# EAGLE board datalogger v1 (EAGLE 9.6.2)
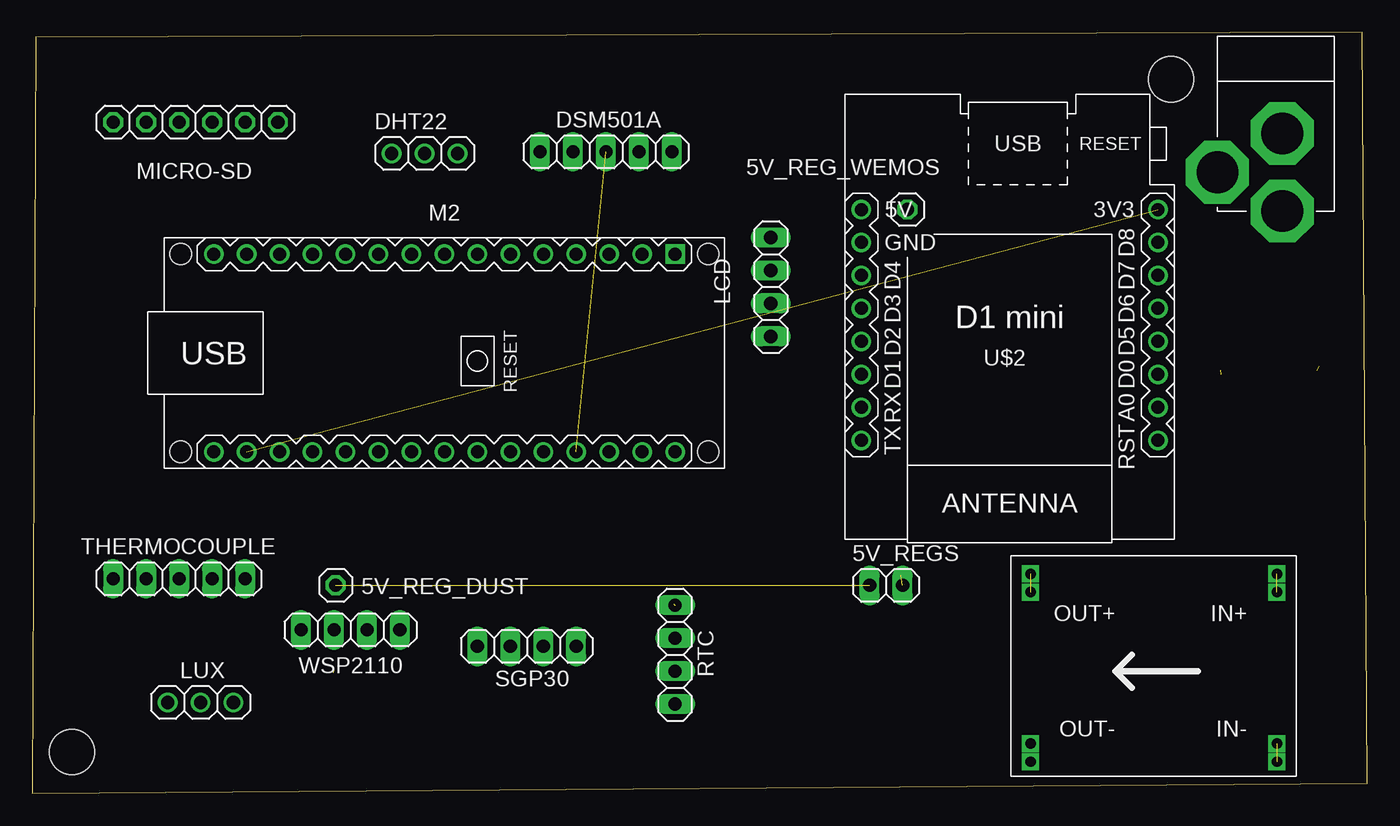
[diagram p0: board, top side]
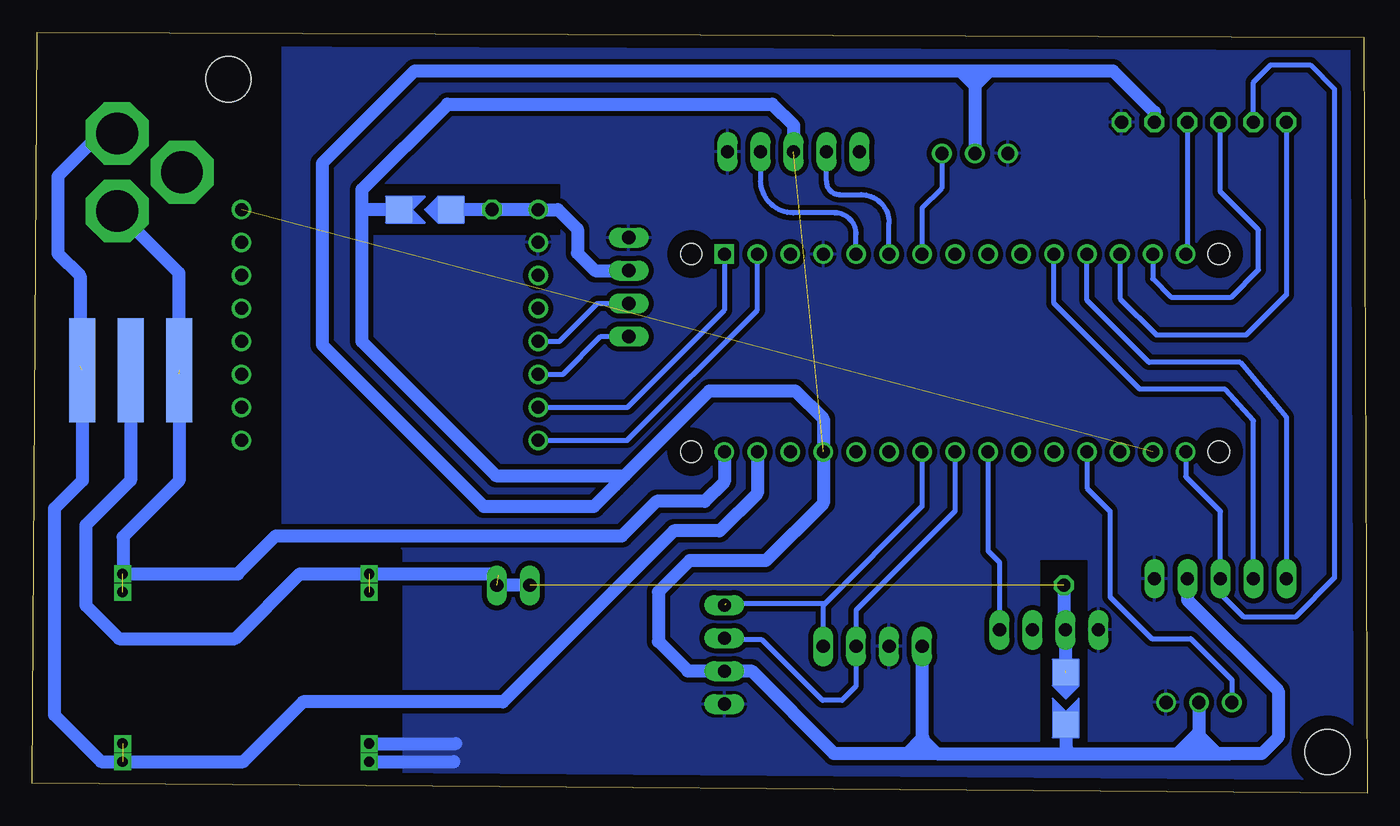
[diagram p1: board, bottom side, seen from below]

Size 102.85 x 58.6 mm. Coordinates in mm from the lower left corner, seen from the top.
Outline: 0,0 102.85,0.76 102.47,58.6 0.25,58.22 0,0
Copper layers (1*16): Top 0.035mm / dielectric 1.5mm / Bottom 0.035mm
Design rules "default *": minimum track width 6mil, minimum drill 0.35mm, track to track 0.4mm, track to pad 0.4mm, pad to pad 0.4mm, via to via 6mil, smd to smd 6mil, copper to edge 40mil, drill to drill 6mil, minimum pad ring 10mil, minimum via ring 8mil, stop-mask expansion 4mil, vias tented up to drill 0mil, thermal gap 10mil
Holes 3.5 mm at 87.76,54.99 3.05,3.17

## Footprints (pad centres in the part's own frame; a part is rotated, then mirrored left to right if it is on the bottom)
1X01 = drill 1.016 octagon: 1 0,0
1X02 = drill 1.016 long: 1 -1.27,0; 2 1.27,0
1X03 = drill 1.016: 1 -2.54,0; 2 0,0; 3 2.54,0
1X05 = drill 1.016 long: 1 -5.08,0; 2 -2.54,0; 3 0,0; 4 2.54,0; 5 5.08,0
1X04 = drill 1.016 long: 1 -3.81,0; 2 -1.27,0; 3 1.27,0; 4 3.81,0
ARDUINO-NANO-3.0 = drill 1 square: J1.1 17.78,7.62 | drill 1: J1.2 15.24,7.62; J1.3 12.7,7.62; J1.4 10.16,7.62; J1.5 7.62,7.62; J1.6 5.08,7.62; J1.7 2.54,7.62; J1.8 0,7.62; J1.9 -2.54,7.62; J1.10 -5.08,7.62; J1.11 -7.62,7.62; J1.12 -10.16,7.62; J1.13 -12.7,7.62; J1.14 -15.24,7.62; J1.15 -17.78,7.62; J2.1 17.78,-7.62; J2.2 15.24,-7.62; J2.3 12.7,-7.62; J2.4 10.16,-7.62; J2.5 7.62,-7.62; J2.6 5.08,-7.62; J2.7 2.54,-7.62; J2.8 0,-7.62; J2.9 -2.54,-7.62; J2.10 -5.08,-7.62; J2.11 -7.62,-7.62; J2.12 -10.16,-7.62; J2.13 -12.7,-7.62; J2.14 -15.24,-7.62; J2.15 -17.78,-7.62 | hole 1.651: -20.32,7.62; -20.32,-7.62; 20.32,-7.62; 20.32,7.62
1X06 = drill 1.016 octagon: 1 -6.35,0; 2 -3.81,0; 3 -1.27,0; 4 1.27,0; 5 3.81,0; 6 6.35,0
DC-BRICK = drill 0.8 square: IN1+ 1.5,1.4; IN1- 1.5,14.47; IN2+ 1.5,2.8; IN2- 1.5,15.87; OUT1+ 20.5,1.4; OUT1- 20.5,14.47; OUT2+ 20.5,2.8; OUT2- 20.5,15.87
WEMOS-D1-MINI = drill 1: JP1.1 -11.43,9.525; JP1.2 -11.43,6.985; JP1.3 -11.43,4.445; JP1.4 -11.43,1.905; JP1.5 -11.43,-0.635; JP1.6 -11.43,-3.175; JP1.7 -11.43,-5.715; JP1.8 -11.43,-8.255; JP2.1 11.43,9.525; JP2.2 11.43,6.985; JP2.3 11.43,4.445; JP2.4 11.43,1.905; JP2.5 11.43,-0.635; JP2.6 11.43,-3.175; JP2.7 11.43,-5.715; JP2.8 11.43,-8.255
EDGE_CONNECTOR = smd 2 x 8 bottom: 5V 4.73,4; 12V 1,4; GND 8.46,4
JOMP-NO = smd 2 x 2 bottom: J1 1,1; J2 5,1
DC-21MM = drill 3.2 pad 4.826 octagon: 1 -5.08,-3.353; 2 -0.076,-6.35; 3 -0.076,-0.356

## Placement (x,y rotation side)
5V_REG_DUST  [1X01]  23.37,16 0 top
5V_REG_WEMOS  [1X01]  67.44,44.96 0 top
5V_REGS  [1X02]  65.79,16 0 top
DHT22  [1X03]  30.23,49.28 0 top
DSM501A  [1X05]  44.2,49.4 0 top
LCD  [1X04]  56.9,38.99 90 top
LUX  [1X03]  12.95,6.99 0 top
M2  ARDUINO-NANO-3.0  [ARDUINO-NANO-3.0]  31.75,33.91 0 top
MICRO-SD  [1X06]  12.57,51.69 180 top
RTC  [1X04]  49.53,10.67 90 top
SGP30  [1X04]  38.1,11.3 0 top
THERMOCOUPLE  [1X05]  11.3,16.51 180 top
U$1  MP1584  [DC-BRICK]  97.41,18.29 180 top
U$2  WEMOS-D1-MINI  [WEMOS-D1-MINI]  75.31,36.7 180 top
U$3  EDGE_CONNECTOR  [EDGE_CONNECTOR]  90.55,28.57 0 top
U$4  JUMP-NO  [JOMP-NO]  69.6,43.94 0 top
U$5  JUMP-NO  [JOMP-NO]  22.23,10.29 270 top
WSP2110  [1X04]  24.51,12.57 0 top
X1  [DC-21MM]  96.39,51.18 0 top

## Library data of the parts
5V_REG_DUST 5V_REG_WEMOS 5V_REGS DSM501A LCD RTC SGP30 THERMOCOUPLE WSP2110 = pinhead
DHT22 LUX MICRO-SD = adafruit
M2 U$2 = diy-modules
U$1 = MP1584-dc-brick
U$3-U$5 = P_Dusk
X1 = power-jack

## Nets
1: X1.1
3V3: M2.J2.14 U$2.JP1.8
5V: DHT22.2 DSM501A.3 LUX.2 M2.J2.4 MICRO-SD.2 RTC.2 SGP30.1 THERMOCOUPLE.2 U$4.J2 U$5.J2
5V_REG: 5V_REG_DUST.1 5V_REGS.1 5V_REGS.2 U$1.OUT1+ U$1.OUT2+ U$3.5V U$5.J1 WSP2110.2
12V: M2.J2.1 U$1.IN1+ U$1.IN2+ U$3.12V X1.2
CLK: M2.J2.15 MICRO-SD.5 THERMOCOUPLE.3
CS: M2.J1.13 MICRO-SD.6
CS_THERMO: M2.J1.11 THERMOCOUPLE.4
D_THERMO: M2.J1.12 THERMOCOUPLE.5
DATA-DHT22: DHT22.3 M2.J1.7
GND: DHT22.1 DSM501A.5 LCD.4 LUX.3 M2.J1.4 MICRO-SD.1 RTC.1 SGP30.2 THERMOCOUPLE.1 U$1.OUT1- U$1.OUT2- U$2.JP2.7 WSP2110.1
GND_ADP: M2.J2.2 U$1.IN1- U$1.IN2- U$3.GND X1.3
LUX_A: LUX.1 M2.J2.12
MISO: M2.J1.15 MICRO-SD.3
MOSI: M2.J1.14 MICRO-SD.4
N$1: DSM501A.1
N$2: 5V_REG_WEMOS.1 LCD.3 U$2.JP2.8 U$4.J1
NC: WSP2110.3
RX_WEMOS: M2.J1.1 U$2.JP2.2
SCL: M2.J2.7 RTC.4 SGP30.4
SCL_LCD: LCD.1 U$2.JP2.3
SDA: M2.J2.8 RTC.3 SGP30.3
SDA_LCD: LCD.2 U$2.JP2.4
SIG: M2.J2.9 WSP2110.4
TX_WEMOS: M2.J1.2 U$2.JP2.1
VOUT-1: DSM501A.4 M2.J1.5
VOUT-2: DSM501A.2 M2.J1.6

## Tracks (layer width: path | path; a pad name or v marks a point on that pad's centre or on a via)
3V3  (1 unrouted)
5V  (1 unrouted)
  Bottom 1: THERMOCOUPLE.2 13.84,14.86 6.86,7.87 6.86,4.32 8.13,3.05 11.56,3.05 13.08,4.57 14.6,3.05 | 31.37,55.64 73.39,55.64 80.52,48.51 80.52,34.54 68.07,22.1 59.57,22.1 57.22,24.45 67.12,24.45 77.47,34.8 77.47,45.21 | 31.37,55.64 29.08,55.64 | 29.08,55.64 19.58,55.64 16.38,52.45 MICRO-SD.2 | M2.J2.4 41.91,25.91 | 49.65,9.51 RTC.2 49.52,9.41 | 49.52,9.41 47.45,9.41 41.08,3.05 35.43,3.05 | 33.15,3.05 35.43,3.05 | M2.J2.4 41.91,22.34 46.34,17.91 52.2,17.91 54.61,15.49 54.61,11.68 52.34,9.41 49.52,9.41 | 33.15,3.05 22.86,3.05 | 22.86,3.05 14.6,3.05 | 14.6,3.05 12.57,3.05 | 12.57,3.05 10.54,3.05 | SGP30.1 34.29,4.32 34.23,4.25 34.29,4.19 | 34.29,4.19 33.15,3.05 | 77.47,45.21 77.47,46.48 70.87,53.09 45.85,53.09 44.2,51.43 DSM501A.3 | 57.98,23.69 50.68,30.99 44.07,30.99 41.91,28.83 M2.J2.4 | 29.08,55.64 30.23,54.5 | 34.29,4.19 35.43,3.05 | LUX.2 12.95,3.43 12.57,3.05 | 31.37,55.64 30.23,54.5 | U$4.J2 77.2,44.94 77.47,45.21 | U$5.J2 23.23,3.41 22.86,3.05 | 30.23,54.5 DHT22.2
5V_REG  (4 unrouted)
  Bottom 1: 5V_REGS.1 5V_REGS.2 | U$3.5V 95.28,24.09 98.73,20.64 98.73,14.46 96.17,11.9 87.23,11.9 82.25,16.89 U$1.OUT1+ 67.05,16.89 66.93,16.76 | 5V_REG_DUST.1 23.37,12.7 WSP2110.2 23.24,9.43
12V  (2 unrouted)
  Bottom 1: M2.J2.1 49.53,24 51.05,22.48 54.75,22.48 57.42,19.81 84.1,19.81 87.02,16.89 U$1.IN1+ 95.87,16.93 95.87,19.75 91.55,24.07 U$3.12V | X1.2 91.57,40.08 91.57,32.26
CLK
  Bottom 0.4: M2.J2.15 13.97,24.38 11.3,21.71 THERMOCOUPLE.3 11.3,15.37 9.53,13.59 5.49,13.59 2.51,16.57 2.51,54.23 4.38,56.1 7.42,56.1 8.76,54.76 MICRO-SD.5
CS
  Bottom 0.4: M2.J1.13 19.05,38.09 16.26,35.3 9.32,35.3 6.22,38.39 MICRO-SD.6
CS_THERMO
  Bottom 0.4: THERMOCOUPLE.4 8.76,28.67 10.98,31.12 17.53,31.12 24.13,37.72 M2.J1.11
D_THERMO
  Bottom 0.4: THERMOCOUPLE.5 6.22,28.95 9.77,33.18 16.8,33.18 21.59,37.97 M2.J1.12
DATA-DHT22
  Bottom 0.4: DHT22.3 32.77,46.61 34.29,45.09 M2.J1.7
GND
  Bottom 1: U$1.OUT1- 70.24,3.82 70.23,3.81 | U$1.OUT2- 70.36,2.42 70.36,2.41
  pour Bottom: 0.51,58.04 0.51,0.64 102.36,0.64 102.36,58.04
GND_ADP  (2 unrouted)
  Bottom 1: M2.J2.2 46.99,23.11 49.91,20.2 53.41,20.2 66.59,7.02 82,7.02 86.61,2.42 U$1.IN2- 97.56,2.42 101.17,6.03 101.17,21.91 99.01,24.07 U$3.GND | 99.19,32.89 99.19,39.84 100.9,41.55 100.9,47.51 97.59,50.82 X1.3
LUX_A
  Bottom 0.4: LUX.1 10.41,8.73 13.59,11.9 16.6,11.9 19.81,15.11 19.81,21.72 21.59,23.5 M2.J2.12
MISO
  Bottom 0.4: M2.J1.15 13.84,41.66 MICRO-SD.3
MOSI
  Bottom 0.4: MICRO-SD.4 11.3,46.32 8.37,43.39 8.37,40.3 10.46,38.22 15.11,38.22 16.51,39.61 M2.J1.14
N$2
  Bottom 1: U$4.J1 70.58,44.96 5V_REG_WEMOS.1 U$2.JP2.8 62.36,44.96 60.84,43.45 60.84,41.6 59.49,40.25 56.91,40.25 LCD.3
NONE
  cutout Bottom: 21.59,17.91 25.15,17.91 25.15,2.67 21.59,2.67
  cutout Bottom: 98.3,18.67 74.55,18.67 74.55,0.13 98.3,0.13
  cutout Bottom: 83.82,57.78 101.85,57.78 101.85,18.29 83.82,18.29
  cutout Bottom: 62.23,46.86 62.23,43.05 77.34,43.05 77.34,46.86
RX_WEMOS
  Bottom 0.4: U$2.JP2.2 57,29.72 49.52,37.2 49.52,41.52 M2.J1.1
SCL  (1 unrouted)
  Bottom 0.4: 41.91,11.81 SGP30.4 41.91,14.48 41.78,14.61 | M2.J2.7 34.29,22.1 41.78,14.61 | 41.78,14.61 49.4,14.61
SCL_LCD
  Bottom 0.4: U$2.JP2.3 61.98,32.26 59.06,35.18 LCD.1
SDA
  Bottom 0.4: SGP30.3 39.37,14.1 31.75,21.72 M2.J2.8 | SGP30.3 39.28,11.21 | RTC.3 49.4,11.81 46.63,11.81 41.97,7.15 40.46,7.15 39.37,8.23 SGP30.3
SDA_LCD
  Bottom 0.4: U$2.JP2.4 62.23,34.8 59.31,37.72 LCD.2
SIG
  Bottom 0.4: M2.J2.9 29.21,18.67 28.32,17.78 WSP2110.4
TX_WEMOS
  Bottom 0.4: M2.J1.2 46.99,37.21 57.02,27.18 U$2.JP2.1
VOUT-1
  Bottom 0.4: M2.J1.5 39.37,43.05 arc-90 41.02,44.7 44.22,44.7 arc90 46.74,47.22 DSM501A.4
VOUT-2
  Bottom 0.25: DSM501A.2 41.78,49.28
  Bottom 0.4: DSM501A.2 41.66,47.12 arc-90 40.64,46.1 39,46.1 arc90 36.83,43.93 M2.J1.6